# Altium PCB CD2840ADX-V22.PcbDoc
Units mil, origin at the board's own origin, x right, y up, seen from the top; angles counter-clockwise.
Board outline 1576.8 x 1102.34 mil, 2 copper layers (Top Layer, Bottom Layer), stack 39.414 mil thick; 60 components, 48 nets, 201 pads, 464 vias.
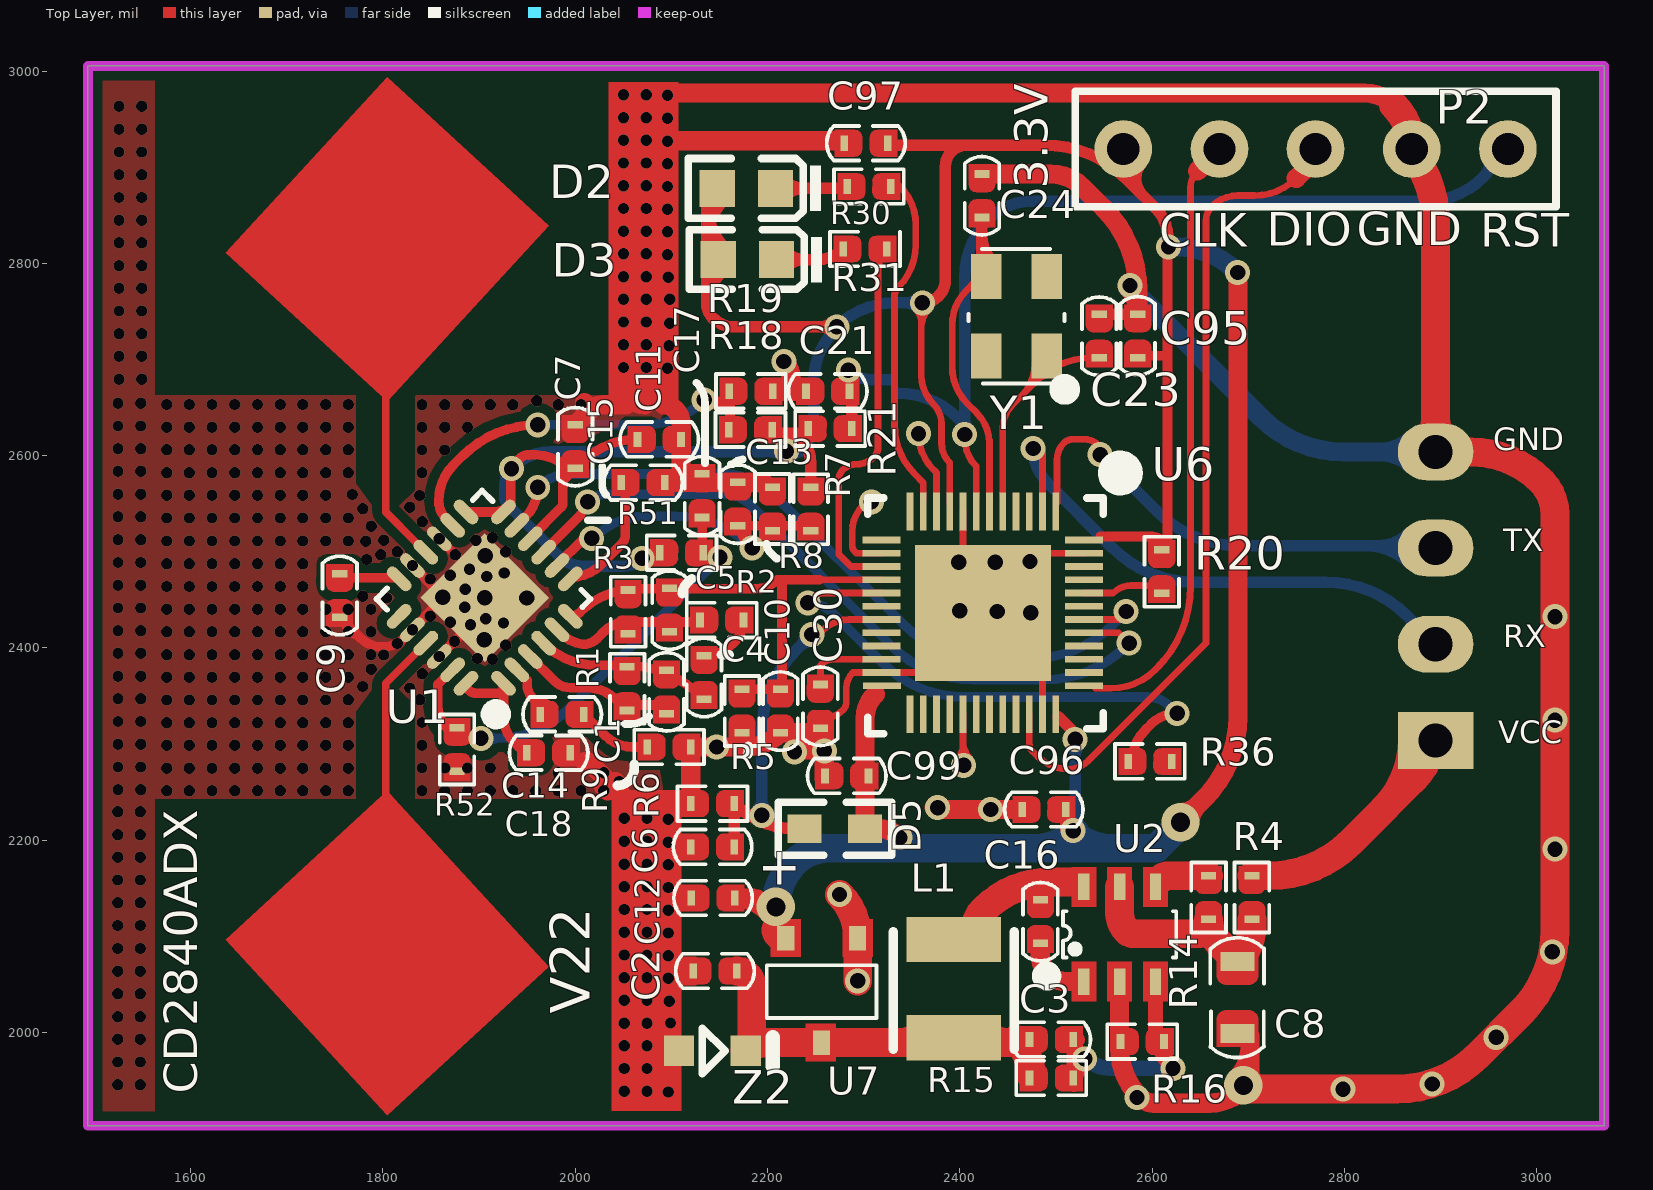
[diagram p0: Top Layer view]
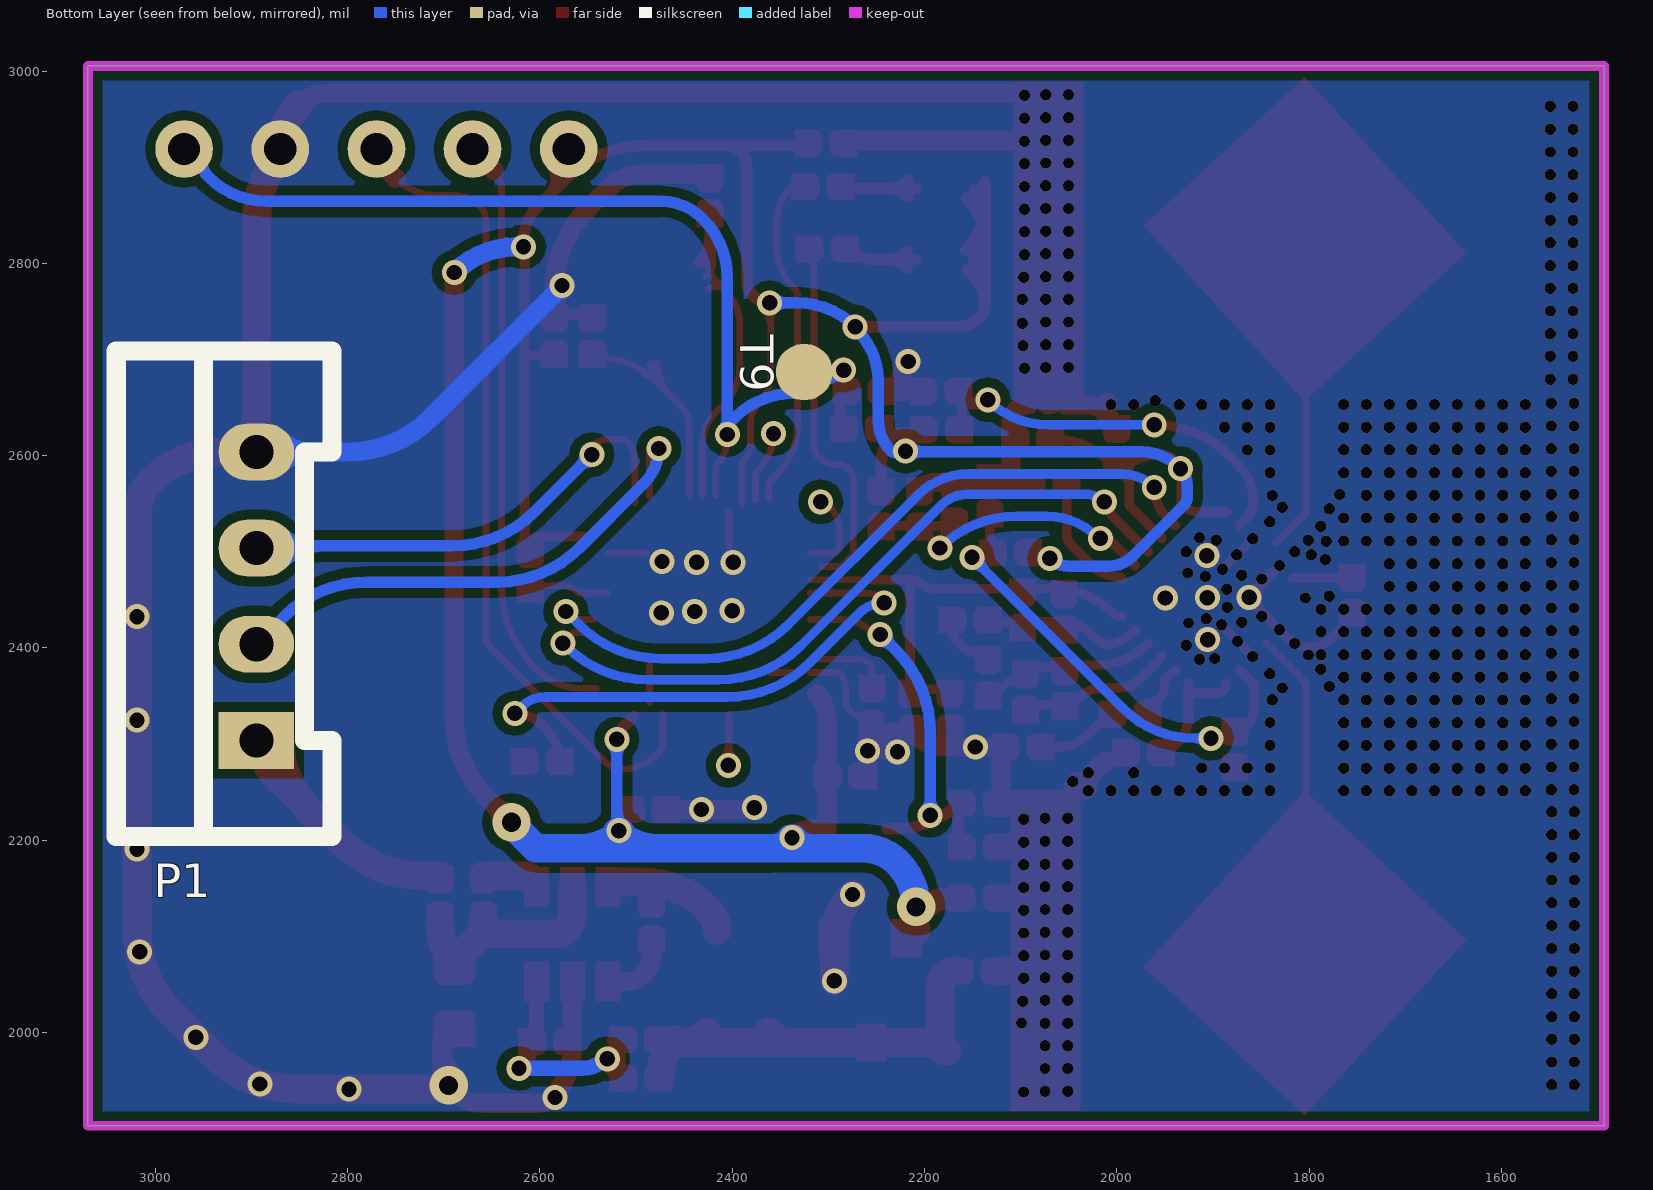
[diagram p1: Bottom Layer view, seen from below]

## Layer stack, top to bottom
Top Layer: signal copper 1.4
Dielectric: core 36.6142, FR-4, Dk 4.8
Bottom Layer: signal copper 1.4

## Board outline
1493.2,3005.34 3070,3005.34 3070,1903 1493.2,1903 1493.2,3005.34

## Design rules (kind name [scope] priority, off if disabled: settings)
Clearance [All] p1: gap=6
ComponentClearance [All] p1: gap=10 collisioncheckmode=3 verticalgap=10
PolygonConnect [All] p1: connectstyle=Direct reliefconductorwidth=10 reliefentries=4 polygonreliefangle="90 Angle"
RoutingVias [All] p1: holewidth=28 width=50 viastyle="Through Hole" minholewidth=15 minwidth=24 maxholewidth=28 maxwidth=50
SolderMaskExpansion [All] p1: expansion=4
TestPointUsage [All] p1: valid=0 allowmultiple=FALSE
Testpoint [All] p1: side=3 testpointundercomponent=TRUE minsize=40 maxsize=100 preferedsize=60 minholesize=0 maxholesize=40 preferedholesize=32 testpointgrid=1 style=297 order=0-112345678
Width [All] p1: maxlimit=30 minlimit=7 preferedwidth=10
18 further rules are at their usual default settings.

## Components (designator, comment, footprint, x,y, rotation, side; value= is the part's Value field where it differs from the comment)
C1 "5nF/NA-FSK" C0402#1 2095,2377 r270 top (schematic designator C16)
C2 "10uF" C0402#1 2168,2064 r180 top (schematic designator C16)
C3 "22pF" C0402#1 2517.75,1992.75 r180 top (schematic designator C16)
C4 "10uF" C0402#1 2134,2392 r270 top (schematic designator C16)
C5 "5nF/NA-FSK" C0402#1 2098,2462 r270 top (schematic designator C16)
C6 "0.1uF" C0402#1 2165.47,2193.1 r180 top (schematic designator C16)
C7 "100nF" C0402#1 2000,2632 r270 top (schematic designator C16)
C8 "10uF/16V" C0603 2688.75,2073.05 r270 top
C9 "100nF" C0402#1 1755,2432 r90 top (schematic designator C16)
C10 "0.1uF/NA-FSK" C0402#1 2213.39,2357 r270 top
C11 "10uF" C0402#1 2110,2617 r180 top (schematic designator C16)
C12 "10uF" C0402#1 2166,2140 r180 top (schematic designator C16)
C13 "10uF" C0402#1 2169,2527 r90 top (schematic designator C16)
C14 "10uF" C0402#1 2009,2331 r180 top (schematic designator C16)
C15 "10uF" C0402#1 2048,2572 r0 top (schematic designator C16)
C16 "0.1uF" C0402#1 2483.75,2138.05 r270 top
C17 "10uF" C0402#1 2132,2581 r270 top (schematic designator C16)
C18 "100pF/NA-FSK" C0402#1 1995,2291 r180 top (schematic designator C16)
C21 "100nF" C0402#2 2240,2667 r0 top
C23 "12pF" C0402#2 2545,2747 r270 top
C24 "12pF" C0402#2 2423,2893 r270 top
C30 "100nF" C0402#2 2255,2362 r270 top
C95 "10uF/6.3V" C0402#2 2585,2702 r90 top
C96 "0.1uF/50V" C0402#2 2510,2232 r180 top
C97 "0.1uF/50V" C0402#2 2325,2925 r180 top
C99 "0.1uF/50V" C0402#2 2305,2267 r180 top
D2 "红灯" LC-0603_LED_S1 2178,2878 r180 top
D3 "绿灯" LC-0603_LED_S1 2179,2804 r180 top
D5 "PT19-21C" LED-0603 2270,2212 r0 top
L1 "PRS3015-100MT" PRS3015 2393.75,2100.75 r270 top
P1 "SWD" XH2.54mm 2894.85,2301.42 r270 bottom locked
P2 "DIP1X5-2.54" DIP1X5-2.54 2570,2919 r0 top
R1 "750k" R0402#1 2054,2335 r90 top (schematic designator R14)
R2 "20k" R0402#1 2175,2429 r180 top (schematic designator R14)
R3 "100K-NA" R0402#1 2055,2415 r90 top (schematic designator R14)
R4 "5.6" R0402#1 2703.75,2163.05 r270 top (schematic designator R14)
R5 "47k/NA-FSK" R0402#1 2173.39,2357 r270 top (schematic designator R14)
R6 "47k" R0402#1 2165.47,2238.1 r180 top (schematic designator R14)
R7 "12K" R0402#1 2245,2567 r270 top (schematic designator R14)
R8 "10k" R0402#1 2205,2522 r90 top (schematic designator R14)
R9 "18K" R0402#1 2075,2297 r0 top (schematic designator R14)
R14 "47k" R0402#1 2658.75,2163.05 r270 top
R15 "25.5k" R0402#1 2517.75,1952.75 r180 top
R16 "5.1k" R0402#1 2567.09,1990.55 r0 top
R18 "10k/NA-FSK" R0402#1 2205,2627 r180 top (schematic designator R14)
R19 "10k/NA-FSK" R0402#1 2160,2667 r0 top (schematic designator R14)
R20 "4.7K" R0402#2 2610,2502 r270 top
R21 "4.7KΩ" R0402#2 2287.8,2628.14 r180 top
R30 "1KΩ" R0402#2 2328,2880 r180 top
R31 "1KΩ" R0402#2 2324,2815 r180 top
R36 "100R" R0402#2 2575,2282 r0 top
R51 "100K" R0402#2 2088,2499 r0 top
R52 "20K" R0402#2 1877,2317 r270 top
T9 "" TestPoints 2330,2692 r270 bottom
U1 "XBR8161" QFN24 1855.75,2513.6 r135 top (schematic designator QFN-1)
U2 "SY8120B1ABC" SOT-23-6 2528.75,2053.05 r90 top
U6 "HC32F460JEUA-QFN48TR" QFN48-5X5mm 2424,2541 r270 top
U7 "ME6216A33M3G" SOT-23-L 2293.75,2098.05 r270 top (schematic designator U6)
Y1 "8MHZ-1C208000CE0R" OSC-SMD_3225 2459,2745 r90 top
Z2 "ESD5Z5.0T1G" SOD323 2189,1981 r180 top

## Footprints (in the part's own frame and the unit in brackets; to place one, negate y for a bottom-side part, rotate by r counter-clockwise, add the part's x,y. Pads: shape width x height; smd on the part's side, far side on the other; paste and mask are expansions set on the pad)
C0402#1 [mm]
  rect 0.2x0.4 smd: 1(0,0) 2(1.15,0)
  Top Layer region: 0.873,0.352 0.873,-0.351 1.401,-0.351 1.401,0.352
  Top Layer region: -0.252,0.352 -0.252,-0.351 0.276,-0.351 0.353,-0.336 0.418,-0.292 0.461,-0.227 0.477,-0.151 0.477,-0.151 0.477,0.152 0.461,0.228 0.418,0.293 0.353,0.337 0.276,0.352 0.276,0.352
  Top Layer region: 1.402,-0.352 1.402,0.351 0.874,0.351 0.797,0.336 0.732,0.292 0.689,0.227 0.673,0.151 0.673,0.151 0.673,-0.152 0.689,-0.228 0.732,-0.293 0.797,-0.337 0.874,-0.352 0.874,-0.352
  silkscreen extent -0.46,-0.46 1.61,0.46, body extent 0.08,-0.3 1.08,0.3, height 0.2
C0402#2 [mm]
  rect 0.2x0.4 smd: 1(0,0) 2(1.15,0)
  Top Layer region: -0.252,0.352 -0.252,-0.351 0.276,-0.355 0.354,-0.34 0.421,-0.295 0.465,-0.229 0.481,-0.151 0.477,-0.151 0.481,0.152 0.465,0.23 0.421,0.296 0.354,0.34 0.276,0.356 0.276,0.352
  Top Layer region: 1.402,-0.352 1.402,0.351 0.874,0.355 0.796,0.34 0.729,0.295 0.685,0.229 0.669,0.151 0.673,0.151 0.669,-0.152 0.685,-0.23 0.729,-0.296 0.796,-0.34 0.874,-0.356 0.874,-0.352
  silkscreen extent -0.46,-0.46 1.61,0.46, body extent 0.08,-0.3 1.08,0.3, height 0.2
C0603 [mil]
  rect 19.8x35.55 smd mask+0: 1(-0.92,0) 2(74,0)
  Top Layer region: 13.34,-21.73 14.89,-21.61 16.39,-21.25 17.82,-20.66 19.14,-19.85 20.32,-18.84 21.33,-17.66 22.14,-16.34 22.73,-14.91 23.09,-13.4 23.21,-11.86 23.18,-11.86 23.21,11.88 23.09,13.43 22.73,14.93 22.14,16.36 21.33,17.68 20.32,18.86 19.14,19.87 17.82,20.68 16.39,21.27 14.89,21.63 13.34,21.75 13.34,21.72 -14.73,21.72 -14.73,-21.7
  Top Layer region: 59.72,-21.73 58.17,-21.61 56.67,-21.25 55.24,-20.66 53.92,-19.85 52.74,-18.84 51.73,-17.66 50.92,-16.34 50.33,-14.91 49.97,-13.4 49.85,-11.86 49.88,-11.86 49.85,11.88 49.97,13.43 50.33,14.93 50.92,16.36 51.73,17.68 52.74,18.86 53.92,19.87 55.24,20.68 56.67,21.27 58.17,21.63 59.72,21.75 59.72,21.72 87.79,21.72 87.79,-21.7
  silkscreen extent -25,-28 99,28, body extent 6,-15 68,16, height 12
DIP1X5-2.54 [mil]
  round 60 hole 33.46: 1(0,0) 2(100,0) 3(200,0) 4(300,0) 5(400,0)
  silkscreen extent -50,-60 450,60
LC-0603_LED_S1 [mm]
  rect 0.93x0.98 smd: A(0.77,0) K(-0.77,0)
  silkscreen extent -1.97,-0.79 1.54,0.79, body extent -0.8,-0.4 0.8,0.4, height 0.6
LED-0603 [mm]
  rect 0.9x0.762 smd: 1(-0.8,0) 2(0.8,0)
  silkscreen extent -1.5,-0.7 1.5,0.7
OSC-SMD_3225 [mm] "OSC-SMD-3225"
  rect 1.2x0.8 smd: 1(-1.05,-0.8) 2(1.05,-0.8) 3(1.05,0.8) 4(-1.05,0.8)
  silkscreen extent -1.98,-1.37 1.78,1.27
PRS3015 [mm]
  rect 1.2x2.5 smd: 1(0.1,0) 2(2.7,0)
  silkscreen extent -0.1,-1.6 3,1.6, body extent -0.1,-1.5 2.9,1.5, height 1.5
QFN24 [mm]
  oval 0.8x0.3 smd: 1(-3.95,1.45) 2(-3.95,0.95) 3(-3.95,0.45) 4(-3.95,-0.05) 5(-3.95,-0.55) 6(-3.95,-1.05) 13(-0.05,-1.05) 14(-0.05,-0.55) 15(-0.05,-0.05) 16(-0.05,0.45) 17(-0.05,0.95) 18(-0.05,1.45)
  oval 0.3x0.8 smd: 7(-3.25,-1.75) 8(-2.75,-1.75) 9(-2.25,-1.75) 10(-1.75,-1.75) 11(-1.25,-1.75) 12(-0.75,-1.75) 19(-0.75,2.15) 20(-1.25,2.15) 21(-1.75,2.15) 22(-2.25,2.15) 23(-2.75,2.15) 24(-3.25,2.15)
  rect 2.4x2.4 smd: 25(-2,0.2)
  silkscreen extent -4.59,-1.75 0.05,2.37
QFN48-5X5mm [mm] "QFN48-5X5mm"
  rect 1x0.18 smd: 1(-0.02,1.925) 2(-0.02,1.575) 3(-0.02,1.225) 4(-0.02,0.875) 5(-0.02,0.525) 6(-0.02,0.175) 7(-0.02,-0.175) 8(-0.02,-0.525) 9(-0.02,-0.875) 10(-0.02,-1.225) 11(-0.02,-1.575) 12(-0.02,-1.925) 25(5.33,-1.925) 26(5.33,-1.575) 27(5.33,-1.225) 28(5.33,-0.875) 29(5.33,-0.525) 30(5.33,-0.175) 31(5.33,0.175) 32(5.33,0.525) 33(5.33,0.875) 34(5.33,1.225) 35(5.33,1.575) 36(5.33,1.925)
  rect 0.18x1 smd: 13(0.73,-2.675) 14(1.08,-2.675) 15(1.43,-2.675) 16(1.78,-2.675) 17(2.13,-2.675) 18(2.48,-2.675) 19(2.83,-2.675) 20(3.18,-2.675) 21(3.53,-2.675) 22(3.88,-2.675) 23(4.23,-2.675) 24(4.58,-2.667) 37(4.58,2.675) 38(4.23,2.675) 39(3.88,2.675) 40(3.53,2.675) 41(3.18,2.675) 42(2.83,2.675) 43(2.48,2.675) 44(2.13,2.675) 45(1.78,2.675) 46(1.43,2.675) 47(1.08,2.675) 48(0.73,2.675)
  rect 3.6x3.6 smd: 49(2.655,0)
  silkscreen extent -1.07,-3.05 5.84,3.7
R0402#1 [mm]
  rect 0.2x0.4 smd: 1(0,0) 2(1.15,0)
  Top Layer region: 0.873,0.352 0.873,-0.351 1.401,-0.351 1.401,0.352
  Top Layer region: -0.252,0.352 -0.252,-0.351 0.276,-0.351 0.353,-0.336 0.418,-0.292 0.461,-0.227 0.477,-0.151 0.477,-0.151 0.477,0.152 0.461,0.228 0.418,0.293 0.353,0.337 0.276,0.352 0.276,0.352
  Top Layer region: 1.402,-0.352 1.402,0.351 0.874,0.351 0.797,0.336 0.732,0.292 0.689,0.227 0.673,0.151 0.673,0.151 0.673,-0.152 0.689,-0.228 0.732,-0.293 0.797,-0.337 0.874,-0.352 0.874,-0.352
  silkscreen extent -0.35,-0.46 1.5,0.46, body extent 0.12,-0.26 1.12,0.24, height 0.35
R0402#2 [mm]
  rect 0.2x0.4 smd: 1(0,0) 2(1.15,0)
  Top Layer region: 1.402,-0.352 1.402,0.351 0.874,0.355 0.796,0.34 0.729,0.295 0.685,0.229 0.669,0.151 0.673,0.151 0.669,-0.152 0.685,-0.23 0.729,-0.296 0.796,-0.34 0.874,-0.356 0.874,-0.352
  Top Layer region: -0.252,0.352 -0.252,-0.351 0.276,-0.355 0.354,-0.34 0.421,-0.295 0.465,-0.229 0.481,-0.151 0.477,-0.151 0.481,0.152 0.465,0.23 0.421,0.296 0.354,0.34 0.276,0.356 0.276,0.352
  silkscreen extent -0.35,-0.46 1.5,0.46, body extent 0.12,-0.26 1.12,0.24, height 0.35
SOD323 [mm]
  rect 0.8x0.8 smd: A(2.06,0) K(0.3,0)
  silkscreen extent 0.84,-0.6 1.44,0.6, body extent -0.17,-0.62 2.53,0.63, height 1.1
SOT-23-6 [mm]
  rect 0.7x0.3 smd: 1(0,0) 2(0,-0.95) 3(0,-1.9) 4(2.5,-1.9) 5(2.5,-0.95) 6(2.5,0)
  Top Layer region: 1.972,-2.226 3.025,-2.226 3.025,-1.573 1.972,-1.573
  Top Layer region: 1.972,-0.335 3.025,-0.335 3.025,0.318 1.972,0.318
  Top Layer region: -0.527,-2.226 0.526,-2.226 0.526,-1.573 -0.527,-1.573
  Top Layer region: -0.527,-1.276 0.526,-1.276 0.526,-0.623 -0.527,-0.623
  Top Layer region: -0.527,-0.335 0.526,-0.335 0.526,0.318 -0.527,0.318
  Top Layer region: 1.972,-1.276 3.025,-1.276 3.025,-0.623 1.972,-0.623
  silkscreen extent 0.63,-2.45 1.86,0.54, body extent -0.16,-2.39 2.64,0.51, height 1.45
SOT-23-L [mm]
  rect 0.65x0.45 smd: 1(0,0) 2(0,-1.9) 3(2.757,-0.95)
  Top Layer region: -0.507,-0.398 0.496,-0.398 0.496,0.405 -0.507,0.405
  Top Layer region: -0.507,-2.303 0.496,-2.303 0.496,-1.5 -0.507,-1.5
  Top Layer region: 2.254,-1.374 3.257,-1.374 3.257,-0.571 2.254,-0.571
  silkscreen extent 0.71,-2.4 2.11,0.5, body extent 0.17,-2.44 2.67,0.56, height 1.05
TestPoints [mil] "TestPoints"
  round 59.06 smd: 1(5,5)
XH2.54mm [mm]
  rect 1.5x2 hole 0.9: 1(-0.064,0)
  oval 1.5x2 hole 0.9: 2(-2.603,0) 3(-5.144,0) 4(-7.683,0)
  silkscreen extent -10.35,-3.7 2.48,2

## Part data
C1 C2 C3 C4 C5 C6 C7 C8 C9 C10 C11 C12 C13 C14 C15 C16 C17 C18 C30: library part Cap, "Capacitor"
C21: library part "0402 100nF (104) 10% 16V", "贴片电容"
C23 C24: library part "0402 22pF (220) 5% 50V", "贴片电容"
C95 C96 C97 C99: library part "0402 2.2nF (222) 10% 50V", "贴片电容"
D2 D3: library part "0603 红灯", "发光二极管"
D5: library part "Photo Sen", "Photosensitive Diode"
L1: library part Inductor, "Inductor"
P1: library part "Header 3", "Header, 3-Pin"
P2: library part DIP1X6-2.54mm
R1 R2 R3 R4 R5 R6 R7 R8 R9 R14 R15 R16 R18 R19 R20 R51 R52: library part Res2, "Resistor"
R21 R36: library part "0402 4.7KΩ (4701) 1%", "贴片电阻"
R30 R31: library part "0402 1KΩ (1001) 1%", "贴片电阻"
T9: library part TestPoints, "TestPoints"
U1: library part XBR1000
U2: library part H9108
U6: library part HC32F460JETA-LQFP48
U7: library part SSP6206
Y1: library part "SMD-3225_4P  25MHZ 12PF 10PPM", "贴片晶振"
Z2: library part "D Zener", "Zener Diode"

## Via types
v1: diameter 11.81, hole 11.81, Top Layer to Bottom Layer, tented both sides, 400 vias
v2: diameter 26, hole 16, Top Layer to Bottom Layer, tented both sides, 61 vias
v3: diameter 40, hole 20, Top Layer to Bottom Layer, tented both sides, 3 vias

## Nets (pads, with @x,y where several pads share a name; then routed paths per layer and width w, separated by ;. In a path a pad name is that pad's centre, name@x,y a point inside that pad or via, vN(x,y) a via of type N, cw(c..) or ccw(c..) an arc to the next point about the centre after c; other vN are vias at no path point)
3.3V: C7.2 C11.2 C12.1 C95.1 C96.1 C97.1 C99.1 D2.A D3.A D5.2 P2.1 R7.1 R18.1 R20.1 R21.2 R51.1 U1.10 U1.12 U1.13 U6.9 U6.24 U6.36 U6.48 U7.2 | length 5085.2
  Top Layer w7: v2@2354.28,2752.28 cw(c2340.48,2738.48) 2360,2738.48 ; 2360,2733.65 cw(c2386.35,2733.65) v2@2367.72,2752.28 ; v2@2360,2759 2360,2683.97 ccw(c2403.38,2683.97) 2372.71,2653.29 cw(c2352.69,2633.27) 2381,2633.27 2381,2613.09 ccw(c2410.19,2613.09) 2389.55,2592.45 U6.9@2389.55,2550
  Top Layer w10: U1.13 1913.75,2541.44 ccw(c1913.75,2567.25) 1932,2549 ccw(c1929.59,2551.41) 1933,2551.41 1933,2575.27 cw(c1963.73,2575.27) 1942,2597 cw(c1951.66,2587.34) 1951.66,2601 ; 1951.68,2600.78 cw(c1956.59,2546.89) C7.2@1994.85,2585.15 ; U1.10 cw(c1954.61,2513.6) 1953.61,2514.61 1985.38,2546.38 ; 1985.37,2546.37 ccw(c1981.45,2550.3) 1987,2550.3 1987,2590 ; 1987,2574 ccw(c1987,2574.67) 1987.47,2574.19 2005.92,2592.64 cw(c2064.72,2533.83) C11.2 ; 1995.09,2581.82 ccw(c1990.19,2586.72) C7.2@1997.13,2586.72 ; C7.2@2002.87,2586.72 cw(c2009.81,2586.72) 2004.91,2591.63 ; 2546,2516 2600.18,2516 cw(c2600.18,2502.08) 2610,2511.94 ; R20.1@2616,2502 v2@2616,2828 ; 2616,2704 C95.1@2589.83,2704 ; C95.1@2589.83,2704 ccw(c2589.83,2697.17) C95.1 cw(c2589.83,2697.17) C95.1@2589.83,2704
  Top Layer w12: v2@2071,2492.75 cw(c2081.86,2481.89) 2081.86,2497.25 2087.75,2497.25 ccw(c2087.75,2483.61) v2@2075.69,2489.98 ; 2136.75,2756.93 cw(c2180.37,2756.93) D3.A@2155.66,2792.87 ; 2136.75,2779.74 cw(c2164.68,2779.74) D3.A@2148.86,2802.76 ; D3.A@2136.75,2820.9 cw(c2203.8,2820.9) D2.A@2156.39,2868.31 ; 2136.75,2834.54 ccw(c2178.24,2834.54) D3.A@2148.9,2805.2 ; 2136.75,2849.88 cw(c2174.83,2849.88) D2.A@2147.9,2876.8 ; D2.A@2136.75,2863.51 ccw(c2207.21,2863.51) D3.A@2157.39,2813.69 ; D2.A@2136.75,2878 2136.75,2758.5 ccw(c2159.09,2758.5) 2143.29,2742.71 ccw(c2145,2744.41) 2145,2742 ccw(c2164.31,2761.31) 2164.31,2734 v2(2272,2734) ; D2.A@2136.75,2881.73 cw(c2141.02,2881.73) D2.A@2138,2884.75 ; R18.1@2205,2623.14 2234.72,2623.14 ; v2@2215.21,2610.08 ccw(c2204.11,2623.14) 2221.25,2623.14 2221.25,2608.37 cw(c2216.13,2608.37) v2@2219.75,2604.75 ; 2221.25,2618.03 ccw(c2233.03,2618.03) v2@2224.7,2609.7 ; 2232.79,2621.21 cw(c2203.32,2591.73) 2245,2591.73 R7.1 ; v2@2267.05,2729.05 ccw(c2255.1,2717.1) 2255.1,2734 ccw(c2255.1,2750.9) v2@2267.05,2738.95 ; 2329.83,2923 2488,2923 cw(c2488,2802.29) 2573.36,2887.64 2603.98,2857.02 cw(c2574.96,2828) v2@2616,2828 ; v2(2361,2759) ccw(c2361,2783) 2385,2783 2385,2901 cw(c2407,2901) 2407,2923 ; U6.36@2502.55,2328.39 2515.8,2315.15 cw(c2505.65,2305) v2(2520,2305) ; v2@2510,2212.24 C96.1 ccw(c2526.74,2232) v2@2520.54,2216.45 ; P2.1@2579.23,2911.34 ccw(c2596.96,2896.62) 2580.67,2880.33 ; P2.1@2588.47,2903.67 ccw(c2607.13,2888.18) 2589.98,2871.02
  Top Layer w20: v3@2199.44,2127.1 ccw(c2180.53,2119.69) 2180.53,2140 ; v3@2201.26,2124.12 ccw(c2166,2092.91) C12.1 2180.53,2140 ; v3@2202.39,2123.03 cw(c2181.03,2097.13) U7.2@2214.6,2097.13 ; v3@2204.32,2121.78 cw(c2196.16,2105.24) U7.2@2214.6,2105.24 ; U7.2@2214.6,2097.64 2214.6,2105.92 ccw(c2208.75,2105.92) 2208.75,2111.78 ccw(c2180.53,2111.78) 2180.53,2140 ; 2312,2352 ccw(c2337.36,2326.64) 2301.5,2326.64 D5.2 2315.42,2212 cw(c2315.42,2180.42) v2@2337.75,2202.75 ; v3(2629.5,2218.75) 2653.89,2243.14 ccw(c2568.54,2328.5) 2689.25,2328.5 v2@2689.25,2790.5 ; v3@2629.5,2228.75 ccw(c2629.5,2252.89) 2646.57,2235.82 ccw(c2663.64,2218.75) v3@2639.5,2218.75
  Top Layer w30: 2208.75,2107.32 ccw(c2217.36,2107.32) 2211.27,2101.23 ccw(c2218.95,2108.9) 2214.6,2098.96 ccw(c2218.95,2108.9) U7.2
  Bottom Layer w12: v2(1933.75,2586.5) ccw(c1950.65,2569.6) 1926.75,2569.6 1926.75,2557.5 ccw(c1940.03,2557.5) 1930.63,2548.12 1983,2495.75 ccw(c2008.95,2521.7) 2008.95,2485 2049.58,2485 ccw(c2049.58,2513.17) v2@2069.5,2493.25 ; v2@1934,2587.25 cw(c1974.44,2546.81) 1974.44,2604 2234.04,2604 ; 2201.04,2604 ccw(c2201.04,2623.46) v2@2214.8,2609.7 ; 2204.66,2604 cw(c2204.66,2589.66) v2@2214.8,2599.8 ; v2@2224.89,2600 cw(c2234.03,2591.55) 2234.03,2604 ; v2@2225.62,2608.57 ccw(c2234.03,2614.04) 2234.03,2604 ; v2@2356.05,2754.05 ccw(c2344.1,2742.1) 2344.1,2759 ccw(c2344.1,2775.9) v2@2356.05,2763.95 ; v2(2361,2759) 2332.36,2759 ccw(c2332.36,2673.64) v2(2272,2734) cw(c2267.78,2734) 2270.76,2731.01 2269.64,2729.89 ccw(c2321.28,2678.25) 2248.25,2678.25 2248.25,2638.32 cw(c2199.72,2638.32) 2234.04,2604 ; v2@2513,2214.9 ccw(c2496.1,2231.8) 2520,2231.8 ; v2@2513.88,2204.25 cw(c2505.39,2192.37) 2520,2192.37 ; v2@2515.05,2300.05 cw(c2503.1,2288.1) 2520,2288.1 cw(c2536.9,2288.1) v2@2524.95,2300.05 ; 2520,2192.49 v2(2520,2305)
  Bottom Layer w20: v2(2617,2817.25) 2624.42,2817.25 cw(c2624.42,2725.92) v2(2689,2790.5)
  Bottom Layer w30: v3(2208.75,2130.75) cw(c2273.93,2130.75) 2227.84,2176.84 cw(c2263.83,2140.85) 2263.83,2191.75 2604.5,2191.75 v3@2628.75,2216 ; 2316.02,2191.75 ccw(c2316.02,2224.48) v2@2339.16,2201.34 ; v2@2336.34,2201.34 ccw(c2359.48,2224.48) 2359.48,2191.75 ; 2478.84,2191.75 ccw(c2478.84,2249.06) v2@2519.36,2208.54 ; v2@2516.54,2208.54 ccw(c2557.06,2249.06) 2557.06,2191.75
  other v2: 2337.75,2202.75 2517.95,2209.95 2069.5,2493.25 2219.75,2604.75
3.6V: C2.1 C3.2 L1.2 R15.2 U7.3 Z2.K | length 503.9
  Top Layer w30: C2.1 cw(c2168,2048.5) 2183.5,2048.5 2183.5,1988.5 cw(c2184.51,1988.5) 2184.51,1989.51 2450.92,1989.51 ; Z2.K@2176.66,1981.53 ccw(c2160.15,1998.04) 2183.5,1998.04 ; Z2.K@2177.72,1980.47 cw(c2199.53,1958.66) 2199.53,1989.51 ; 2335.41,1989.51 ccw(c2335.41,2027.2) L1.2@2362.06,2000.55 ; L1.2@2425.6,2000.39 ccw(c2450.92,2024.41) 2450.92,1989.51 ; R15.2@2474.56,1954.58 ccw(c2420.58,1954.58) 2458.75,1992.75 cw(c2450.92,2000.58) 2450.92,1989.51
5-15V: P1.1 R4.1 | length 337.4
  Top Layer w30: R4.1 2721.55,2163.05 ccw(c2721.55,2283.76) 2806.9,2198.4 2871.77,2263.27 ccw(c2823.55,2311.5) P1.1@2891.75,2311.5 ; 2840.83,2232.33 ccw(c2769.24,2303.92) P1.1@2870.48,2303.92
ADC1: U6.10 | length 83.5
  Top Layer w7: v2@2360.48,2614.6 cw(c2368.88,2623) v2(2357,2623) ccw(c2410.11,2623) 2372.56,2585.44 2375.55,2582.45 ; U6.10@2375.77,2554 2375.77,2582.23
ADC2: U6.14 | length 90.1
  Top Layer w7: v2(2308,2552) ccw(c2308,2539.93) 2299.46,2548.46 2299.19,2548.19 ccw(c2326.21,2521.17) 2288,2521.17 2288,2507.24 ccw(c2298.24,2507.24) 2291,2500 2291.92,2499.08 ccw(c2292.73,2499.89) 2292.73,2498.74 2292.77,2498.7 ccw(c2293.31,2499.23) 2293.31,2498.48 U6.14
ADC3: U6.18
FSK_PWM: U1.9 U6.41 | length 739.3
  Top Layer w7: U6.41@2546,2415.8 2565.2,2415.8 v2@2577,2404
  Top Layer w10: U1.9 cw(c1968.14,2499.68) 1967.41,2500.41 2005.46,2538.46
  Bottom Layer w10: v2(2013,2552) ccw(c2013,2556.83) 2016.41,2553.41 cw(c2032.31,2537.51) 2032.31,2560 2155,2560 cw(c2155,2521.37) 2182.31,2548.69 2328.64,2402.36 ccw(c2414,2487.71) 2414,2367 2488,2367 ccw(c2488,2487.71) 2573.36,2402.36 v2(2576,2405)
GND: C2.2 C6.2 C7.1 C8.2 C9.1 C10.2 C11.1 C12.2 C13.2 C15.2 C17.1 C18.1 C21.1 C23.1 C24.1 C30.2 C95.2 C96.2 C97.2 C99.2 P1.4 P2.4 R5.2 R6.2 R8.2 R9.2 R16.1 R19.2 R52.2 U1.15 U1.17 U1.20 U1.22 U1.25 U2.2 U6.8 U6.23 U6.35 U6.47 U6.49 U7.1 Z2.A | length 5343
  Top Layer w7: 2258,2327 ccw(c2258,2355.97) 2278.49,2335.49 ccw(c2270,2343.97) 2282,2343.97 2282,2358.32 cw(c2304.52,2358.32) 2288.6,2374.24 ; 2288.81,2374.46 U6.23 ; U6.23@2335,2374.47 U6.49@2361,2374.47 ; U6.49@2401,2494 ccw(c2395.37,2499.63) 2403.33,2499.63 U6.8 ; U6.35@2486,2343 U6.49@2486,2381 ; U6.49@2489,2498 cw(c2490.16,2496.84) 2490.16,2498.48 U6.47
  Top Layer w10: C9.1 1776.57,2410.43 ccw(c1799.34,2433.21) 1799.34,2401 ccw(c1799.34,2433.37) 1822.23,2410.48 v1(1830.7,2418.95) 1863,2453 1854,2462 v1(1830.7,2485.76) ; C9.1@1757.87,2432 ccw(c1764.81,2432) 1759.91,2427.09 ; C9.1@1758.05,2428.95 cw(c1745.87,2416.77) v1@1763.09,2416.77 ; v1@1764,2415.86 cw(c1764,2398.64) 1776.18,2410.82 ; v1@1848.1,2468.01 cw(c1832.78,2452.98) U1.25@1854.24,2452.77 ; v1@1848.63,2437.85 ccw(c1833.78,2451.94) U1.25@1854.25,2452.48 ; 1849.76,2439.04 cw(c1862.93,2426.55) U1.25@1862.45,2444.7 ; v1@1850.04,2433.02 cw(c1864.88,2433.42) U1.25@1854.11,2443.63 ; v1@1850.04,2471.71 ccw(c1863.93,2471.71) U1.25@1854.11,2461.89 ; 1850.23,2465.84 ccw(c1862.49,2477.86) U1.25@1862.32,2460.69 ; v1(1858.54,2391.11) v1(1891,2424) ; v1(1858.54,2513.6) v1(1890,2482) ; v1@1850,2471.42 ccw(c1856.55,2469.26) 1851.62,2464.42 cw(c1856.32,2469.17) v1@1849.99,2471.41
  Top Layer w12: C23.1 cw(c2545.67,2746.33) 2545.67,2747.28 C95.2
  Top Layer w20: C7.1 2015.34,2647.34 cw(c2029,2633.69) 2029,2653 ; 2007.56,2639.56 ccw(c1998.44,2648.68) v1@2009.55,2655.22 ; 2010,2282 cw(c2010,2273.17) 2016.24,2279.42 2052.95,2242.71 ; v1@2026.42,2269.24 cw(c2008.75,2251.57) v1@2033.74,2251.57 ; v1@2029.65,2255.66 cw(c2029.65,2230.67) 2047.32,2248.34 ; 2029.65,2653 2053,2653 ; 2033.78,2261.88 ccw(c2045.62,2273.72) v1@2045.62,2256.97 ; v1@2041.53,2261.07 ccw(c2058.27,2261.07) 2046.43,2249.23 ; v1@2053.81,2977.25 2820.7,2977.25 cw(c2820.7,2934.28) 2851.08,2964.67 ; 2089.25,2195.75 2117.55,2195.75 cw(c2117.55,2193.1) C6.2 ; 2091.93,2653 cw(c2091.93,2635.93) 2104,2648 cw(c2089.51,2633.51) 2110,2633.51 2110,2572 ; v1@2093.98,2130.12 cw(c2115.41,2108.69) 2115.41,2139 ; v1@2093.98,2147.95 ccw(c2115.59,2169.57) 2115.59,2139 ; C15.2@2095.28,2572 2188.47,2572 cw(c2188.47,2550.75) R8.2@2203.5,2565.78 ; v1@2096.18,2927.5 C97.2@2279.72,2927.5 ; 2099.5,2139 2119.72,2139 ccw(c2119.72,2140) C12.2 ; R6.2@2120.2,2243 2120.2,2296.81 cw(c2120.46,2296.81) R9.2 2177.84,2297 ccw(c2177.84,2347.27) C10.2 2243.1,2311.72 cw(c2243.1,2294.91) 2254.98,2306.8 ; R19.2@2203,2667 C21.1 ; v2(2217,2698) cw(c2198.46,2679.46) 2224.68,2679.46 ; v2(2228,2292) cw(c2232.83,2287.17) 2232.83,2294 v2@2259,2294 ; C99.2@2259,2264 2259,2307.07 ; v2@2373,2234 ccw(c2377.83,2238.83) 2377.83,2232 C96.2 ; C24.1@2422.11,2893 2494.29,2893 cw(c2494.29,2845.41) 2527.94,2879.06 2549.66,2857.34 cw(c2464.31,2771.98) 2585.02,2771.98 C95.2 ; U2.2 2566.15,1984.04 ccw(c2639.04,1984.04) 2587.5,1932.5 ccw(c2601.99,1946.99) 2601.99,1926.5 2659.64,1926.5 ccw(c2659.64,1976.86) 2695.25,1941.25 ccw(c2679.56,1956.94) 2701.75,1956.94 C8.2@2701.75,1997 ; v2@2574.88,2774.88 cw(c2550.4,2750.4) C95.2@2585.02,2750.4 ; v3@2687.93,1952.07 ccw(c2654.56,1985.44) 2701.75,1985.44 ; C8.2@2696.69,1999.12 cw(c2684.49,1986.91) 2701.75,1986.91 ; 2033.69,2653 ccw(c2033.69,2678.31) 2051.59,2660.41 cw(c2033.69,2678.31) 2033.69,2653 ; 2054.41,2660.41 ccw(c2072.31,2678.31) 2072.31,2653 cw(c2072.31,2678.31) 2054.41,2660.41
  Top Layer w30: 2112.84,2064 C2.2 ; v2(2274.87,2143.63) cw(c2229.29,2098.05) U7.1 v2(2293.75,2053.75) ; v3@2695.25,1941.25 2854,1941.25 ccw(c2854,2061.96) 2939.36,1976.61 2983.64,2020.89 ccw(c2898.29,2106.25) 3019,2106.25 3019,2539.1 ccw(c2970.35,2539.1) 3004.75,2573.5 ccw(c2931.31,2500.06) 2931.31,2603.92 P1.4 2894.85,2842.15 ccw(c2774.14,2842.15) P2.4@2859.5,2927.5 ; v3@2698.54,1948.54 ccw(c2716.12,1966.12) 2716.12,1941.25 ; 2851.08,2964.67 cw(c2805.42,2919) P2.4 ; P1.4@2884.58,2614.19 ccw(c2859.78,2638.99) 2894.85,2638.99 ccw(c2929.92,2638.99) P1.4@2905.12,2614.19
  Bottom Layer w20: v2@1905.52,2494.33 cw(c1907.85,2494.33) v2(1906.2,2495.97) ; v2@1947.04,2451 ccw(c1947.04,2454.46) v2(1949.48,2452.01) ; v2(2577,2777) ccw(c2579.41,2777) 2577.71,2775.29 2713.73,2639.27 ccw(c2799.08,2724.63) 2799.08,2603.92 P1.4 ; P1.4@2871.2,2590.11 ccw(c2837.86,2556.77) 2837.86,2603.92 ccw(c2837.86,2651.06) P1.4@2871.2,2617.73
  other v1: 2096.87,1938.25 2051,1939 2074.62,1939 1524,1945.73 1547.62,1945.73 2051,1962.62 2074.62,1962.62 1524,1969.35 1547.62,1969.35 2051,1986.24 2074.62,1986.24 1524,1992.98 1547.62,1992.98 2051,2009.87 2074.62,2009.87 2099,2010 1524,2016.6 1547.62,2016.6 2051,2033.49 2074.62,2033.49 2097.75,2032.75 1524,2040.22 1547.62,2040.22 2096.87,2056.36 2051,2057.11 2074.62,2057.11 1524,2063.84 1547.62,2063.84 2096.87,2079.98 2051,2080.73 2074.62,2080.73 1524,2087.46 1547.62,2087.46 2051,2104.35 2074.62,2104.35 2096.87,2103.6 1524,2111.39 1547.62,2111.39 2096.87,2127.23 2051,2127.98 2074.62,2127.98 1524,2135.01 1547.62,2135.01 2096.87,2150.85 2051,2151.6 2074.62,2151.6 1524,2158.63 1547.62,2158.63 2096.87,2174.47 2051,2175.22 2074.62,2175.22 1524,2182.26 1547.62,2182.26 2096.87,2198.09 2051,2198.84 2074.62,2198.84 1524,2205.88 1547.62,2205.88 2096.87,2222.02 2051,2222.77 2074.62,2222.77 1524,2229.5 1547.62,2229.5 1575.02,2251.42 1598.65,2251.42 1622.27,2251.42 1645.89,2251.42 1669.51,2251.42 1693.13,2251.42 1716.76,2251.42 1740.38,2251.42 1764,2251.42 1840.67,2251.57 1864.29,2251.57 1887.91,2251.57 1911.54,2251.57 1935.16,2251.57 1958.78,2251.57 1982.4,2251.57 2006.02,2251.57 2029.65,2251.57 1524.5,2252.62 1548.12,2252.62 2045.62,2261.07 1982.4,2270.38 2029.65,2270.38 1575.02,2275.04 1598.65,2275.04 1622.27,2275.04 1645.89,2275.04 1669.51,2275.04 1693.13,2275.04 1716.76,2275.04 1740.38,2275.04 1764,2275.04 1840.67,2275.19 1864.29,2275.19 1887.91,2275.19 1911.54,2275.19 1524.5,2276.24 1548.12,2276.24 1575.02,2298.66 1598.65,2298.66 1622.27,2298.66 1645.89,2298.66 1669.51,2298.66 1693.13,2298.66 1716.76,2298.66 1740.38,2298.66 1764,2298.66 1840.67,2298.81 1524.5,2299.87 1548.12,2299.87 1575.02,2322.28 1598.65,2322.28 1622.27,2322.28 1645.89,2322.28 1669.51,2322.28 1693.13,2322.28 1716.76,2322.28 1740.38,2322.28 1764,2322.28 1840.67,2322.43 1524.5,2323.49 1548.12,2323.49 1575.02,2345.9 1598.65,2345.9 1622.27,2345.9 1645.89,2345.9 1669.51,2345.9 1693.13,2345.9 1716.76,2345.9 1740.38,2345.9 1764,2346.13 1838.35,2346.13 1524.5,2347.11 1548.12,2347.11 1828.04,2358.32 1779,2360 1575.02,2369.53 1598.65,2369.53 1622.27,2369.53 1645.89,2369.53 1669.51,2369.53 1693.13,2369.53 1716.76,2369.53 1740.38,2369.53 1764,2369.53 1524.5,2370.73 1548.12,2370.73 1841,2373.23 1788,2378 1914,2388.24 1898,2389 1575.02,2393.15 1598.65,2393.15 1622.27,2393.15 1645.89,2393.15 1669.51,2393.15 1693.13,2393.15 1716.76,2393.15 1740.38,2393.15 1764,2393.15 1787.62,2393.15 1800.78,2392.73 1524.5,2394.35 1548.12,2394.35 1927.66,2403 1815,2404.63 1874.36,2407.14 1575.02,2416.77 1598.65,2416.77 1622.27,2416.77 1645.89,2416.77 1669.51,2416.77 1693.13,2416.77 1716.76,2416.77 1740.38,2416.77 1764,2416.77 1787.62,2416.77 1524.5,2417.98 1548.12,2417.98 1925.35,2426 1870,2426.72 1907,2430.55 1849.14,2433 1575.02,2440.39 1598.65,2440.39 1622.27,2440.39 1645.89,2440.39 1669.51,2440.39 1693.13,2440.39 1716.76,2440.39 1740.38,2440.39 1764,2440.39 1787.62,2440.39 1524.5,2441.6 1548.12,2441.6 1885,2442.22 1803.92,2452 1779,2453.84 1885.43,2461.15 1575.02,2464.01 1598.65,2464.01 1622.27,2464.01 1645.89,2464.01 1669.51,2464.01 1693.13,2464.01 1716.76,2464.01 1524.5,2465.22 1548.12,2465.22 1849.14,2471.71 1908,2474.41 1870,2475.57 1926,2478 1575.02,2487.64 1598.65,2487.64 1622.27,2487.64 1645.89,2487.64 1669.51,2487.64 1693.13,2487.64 1716.76,2487.64 1524.5,2488.84 1548.12,2488.84 1783,2492 1797.68,2497 1875.2,2496.87 1815,2500.08 1927.66,2500 1575.02,2511.26 1598.65,2511.26 1622.27,2511.26 1645.89,2511.26 1669.51,2511.26 1693.13,2511.26 1716.76,2511.26 1740.38,2511.26 1764,2511.26 1782,2511 1524.5,2512.46 1548.12,2512.46 1800.78,2511.98 1896.65,2512 1914,2514.61 1788,2526.71 1841,2531.47 1575.02,2535.18 1598.65,2535.18 1622.27,2535.18 1645.89,2535.18 1669.51,2535.18 1693.13,2535.18 1716.76,2535.18 1740.38,2535.18 1764,2535.18 1524.5,2536.39 1548.12,2536.39 1779,2544.71 1828.04,2546.39 1575.02,2558.81 1598.65,2558.81 1622.27,2558.81 1645.89,2558.81 1669.51,2558.81 1693.13,2558.81 1716.76,2558.81 1740.38,2558.81 1838.35,2558.58 1524.5,2560.01 1548.12,2560.01 1768,2559.71 1575.02,2582.43 1598.65,2582.43 1622.27,2582.43 1645.89,2582.43 1669.51,2582.43 1693.13,2582.43 1716.76,2582.43 1740.38,2582.43 1764,2582.43 1840.67,2582.28 1524.5,2583.63 1548.12,2583.63 1575.02,2606.05 1598.65,2606.05 1622.27,2606.05 1645.89,2606.05 1669.51,2606.05 1693.13,2606.05 1716.76,2606.05 1740.38,2606.05 1764,2606.05 1840.67,2605.9 1864.29,2605.9 1524.5,2607.26 1548.12,2607.26 1575.02,2629.67 1598.65,2629.67 1622.27,2629.67 1645.89,2629.67 1669.51,2629.67 1693.13,2629.67 1716.76,2629.67 1740.38,2629.67 1764,2629.67 1840.67,2629.52 1864.29,2629.52 1887.91,2629.52 1524.5,2630.88 1548.12,2630.88 1575.02,2653.29 1598.65,2653.29 1622.27,2653.29 1645.89,2653.29 1669.51,2653.29 1693.13,2653.29 1716.76,2653.29 1740.38,2653.29 1764,2653.29 1840.67,2653.14 1864.29,2653.14 1887.91,2653.14 1911.54,2653.14 1935.16,2653.14 1982.4,2653.14 2006.02,2653.14 1524.5,2654.5 1548.12,2654.5 1960,2657 1525.5,2679.62 1549.12,2679.62 2096,2691 2050.13,2691.75 2073.75,2691.75 1525.5,2703.24 1549.12,2703.24 2097.5,2714.5 2050.13,2715.37 2073.75,2715.37 1525.5,2726.87 1549.12,2726.87 2098.25,2737.75 2050.13,2738.99 2073.75,2738.99 1525.5,2750.49 1549.12,2750.49 2050.13,2762.62 2073.75,2762.62 2098.13,2762.75 1525.5,2774.11 1549.12,2774.11 2050.13,2786.24 2073.75,2786.24 2096.88,2785.5 1525.5,2797.73 1549.12,2797.73 2096,2809.11 2050.13,2809.86 2073.75,2809.86 1525.5,2821.35 1549.12,2821.35 2050.13,2833.48 2073.75,2833.48 2096,2832.73 1525.5,2844.98 1549.12,2844.98 2096,2856.35 2050.13,2857.1 2073.75,2857.1 1525.5,2868.6 1549.12,2868.6 2096,2879.98 2050.13,2880.73 2073.75,2880.73 1525.5,2892.22 1549.12,2892.22 2050.13,2904.35 2073.75,2904.35 2096,2903.6 1525.5,2915.84 1549.12,2915.84 2096,2927.22 2050.13,2927.97 2073.75,2927.97 1525.5,2939.46 1549.12,2939.46 2096,2950.84 2050.13,2951.59 2073.75,2951.59 1525.5,2963.39 1549.12,2963.39 2096,2974.77 2050.13,2975.52 2073.75,2975.52
  other v2: 2584.25,1932.5 2798.5,1941.25 2891.25,1946.5 2957.78,1995.03 3016.25,2084 3019,2190.75 2432,2232 2377,2234 2259,2293 2147,2297 3019,2325 1905.52,2408.73 3019,2432.5 2473.75,2436.5 2439,2438 2400,2438.75 1905.86,2452.35 1862.24,2452.7 2399,2489 2437,2489 2473,2490
  other v3: 2695,1945
GREEN_LED: R31.1 U6.15 | length 383
  Top Layer w7: U6.15@2307,2484.7 2287,2484.7 2274,2497.7 2274,2575 cw(c2288.49,2575) 2278.24,2585.24 cw(c2292.14,2571.34) 2292.14,2591 ccw(c2292.14,2617.21) 2310.68,2598.68 ccw(c2300.24,2609.11) 2315,2609.11 2315,2793.27 cw(c2345.73,2793.27) R31.1
IFCAP: C17.2 R51.2 R52.1 U1.23 | length 553.5
  Top Layer w10: U1.23 1857,2362 1857,2340 ccw(c1891,2340) 1891,2306 v2(1902,2306) ; C17.2 2132,2502.08 ccw(c2136.36,2502.08) R51.2 ; v2@2142.85,2491.91 ccw(c2133.28,2488.99) R51.2 ; v2@2150.5,2494.25 ccw(c2139.03,2482.78) 2139.03,2499 R51.2
  Bottom Layer w10: v2(1902,2306) 1919,2306 ; v2@1908.16,2300.9 cw(c1919,2291.94) 1919,2306 ; v2@1908.16,2311.1 ccw(c1919,2320.06) 1919,2306 ; v2@2142.5,2494.25 cw(c2123.19,2494.25) 2136.84,2480.59 cw(c2150.5,2466.94) v2@2150.5,2486.25 ; v2(2150.5,2494.25) 1992.83,2336.58 cw(c1919,2410.41) 1919,2306
IFON: C18.2 U1.1 U1.24 | length 136.6
  Top Layer w10: U1.24 ccw(c1896.65,2363.27) 1896.65,2353 1925.35,2353 ; U1.1 1925.35,2328.62 ccw(c1962.99,2328.62) 1936.38,2302 1945.71,2292.66 ccw(c1949.72,2296.67) C18.2 ; 1940.81,2297.57 ccw(c1949.72,2306.48) C18.2@1949.72,2293.87
LIGHT: C6.1 D5.1 R6.1 U6.19 | length 464.6
  Top Layer w7: v2@2244.71,2405.71 2257,2418 cw(c2284.96,2390.04) 2284.96,2429.58 U6.19
  Top Layer w12: C6.1 R6.1 ccw(c2228.48,2301.1) 2228.48,2212 D5.1
  Bottom Layer w12: v2@2189.05,2230.95 ccw(c2177.1,2242.9) 2194,2242.9 ccw(c2210.9,2242.9) v2@2198.95,2230.95 ; v2(2194,2226) 2194,2312 cw(c2314.71,2312) 2229.36,2397.36 v2(2246,2414) ; v2@2239,2414 cw(c2222.1,2414) 2234.05,2402.05 cw(c2246,2390.1) v2@2246,2407
NetC3_1: C3.1 R15.1 R16.2 U2.3 | length 259.3
  Top Layer w16: R15.1@2518.75,1946.35 cw(c2543.53,1946.35) v2@2532.06,1968.32 ; R15.1@2518.75,1948.75 2518.75,1984.49 cw(c2530.15,1984.49) 2522.09,1992.55 ; U2.3 2603.54,2006.72 ccw(c2665.72,2006.72) v2(2621.75,1962.75)
  Bottom Layer w16: v2@2532.01,1972.75 ccw(c2556.15,1996.89) 2556.15,1962.75 v2(2621.75,1962.75)
  other v2: 2529.75,1972.75
NetC4_1: C4.1 R2.1 | length 61
  Top Layer w10: C4.1 ccw(c2134,2433.97) 2163.68,2404.29 2165.54,2406.15 ccw(c2142.69,2429) R2.1
NetC8_1: C8.1 R4.2 R14.2 U2.5 | length 237.5
  Top Layer w30: U2.5 2566.14,2124.11 ccw(c2592.11,2124.11) 2573.75,2105.75 ccw(c2580.99,2112.99) 2580.99,2102.75 2646.42,2102.75 ccw(c2646.42,2120.16) 2658.73,2107.85 ; R14.2 ccw(c2692.07,2117.77) 2668.51,2094.21 C8.1 ccw(c2652.54,2110.18) 2703.75,2110.18 R4.2
NetC14_1: C14.1 R9.1 | length 83.8
  Top Layer w10: C14.1@2009,2328.13 cw(c2009,2321.19) 2013.91,2326.09 ; C14.1 2030.98,2309.02 ccw(c2060,2338.04) 2060,2297 R9.1
NetC16_1: C16.1 L1.1 U2.6 | length 127.9
  Top Layer w30: L1.1@2415.75,2106.02 cw(c2446.48,2106.02) 2424.75,2127.75 cw(c2494.76,2057.74) 2494.76,2156.75 2520.75,2156.75
NetC16_2: C16.2 U2.1 | length 73.2
  Top Layer w20: C16.2 2483.75,2080.06 ccw(c2511.06,2080.06) 2491.75,2060.75 ccw(c2510.34,2079.34) 2510.34,2053.05 U2.1
NetC30_1: C30.1 U6.22 | length 85.4
  Top Layer w7: C30.1 2255,2380.59 cw(c2258.41,2380.59) 2256,2383 cw(c2268.66,2370.34) 2268.66,2388.24 U6.22
NetD2_K: D2.K R30.2 | length 121.6
  Top Layer w12: D2.K 2277.9,2878 ccw(c2277.9,2884.83) R30.2 ; D2.K@2217.02,2869.3 cw(c2238.03,2848.29) 2238.03,2878 cw(c2238.03,2907.71) D2.K@2217.02,2886.7
NetD3_K: D3.K R31.2 | length 119
  Top Layer w12: D3.K 2252.17,2804 ccw(c2252.17,2841.56) R31.2 ; D3.K@2218.02,2795.3 cw(c2239.03,2774.29) 2239.03,2804 cw(c2239.03,2833.71) D3.K@2218.02,2812.7
NetR14_1: R14.1 U2.4 | length 50.9
  Top Layer w30: U2.4@2608.75,2159.75 cw(c2616.72,2151.78) 2616.72,2163.05 R14.1
NetR20_2: R20.2 U6.44 | length 85
  Top Layer w7: U6.44 2559.37,2457.14 cw(c2578.34,2438.17) 2578.34,2465 2590.02,2465 cw(c2590.02,2436.75) R20.2
NetR36_1: R36.1 U6.17 | length 578.4
  Top Layer w7: v2@2242,2449 cw(c2261.66,2429.34) 2261.66,2457.14 U6.17
  Top Layer w10: 2579,2281 cw(c2627.28,2281) 2593.14,2315.14 2598.69,2320.69 cw(c2626,2293.37) v2(2626,2332)
  Bottom Layer w10: v2(2242,2447) cw(c2242,2410.79) 2267.61,2436.39 2319.64,2384.36 ccw(c2405,2469.71) 2405,2349 2595,2349 cw(c2595,2315.2) 2618.9,2339.1 v2(2626,2332)
NRST: C21.2 P2.5 R21.1 T9.1 U6.7 | length 1112.9
  Top Layer w7: v2(2405,2622) 2405,2617.93 ccw(c2445.59,2617.93) 2416.89,2589.23 ; U6.7@2417.11,2558 2417.11,2589.01
  Top Layer w12: v2@2279.05,2684.05 cw(c2257.92,2662.92) C21.2@2287.8,2662.92 ; v2@2281.04,2682.66 cw(c2276.09,2672.05) C21.2@2287.8,2672.05 ; R21.1 C21.2@2287.8,2672.48
  Bottom Layer w12: v2(2284,2689) ccw(c2308.14,2713.14) 2308.14,2679 T9.1@2327,2679 ; T9.1@2335.33,2665 cw(c2335.33,2576.47) 2397.93,2639.07 cw(c2380.86,2622) v2(2405,2622) 2405,2784.94 cw(c2492.06,2784.94) 2430.5,2846.5 cw(c2473.96,2803.04) 2473.96,2864.5 2883.19,2864.5 ccw(c2883.19,2951.56) 2944.75,2890 ccw(c2927.25,2907.5) 2952,2907.5 P2.5@2952,2935 ; v2@2400.05,2626.95 ccw(c2388.1,2638.9) 2405,2638.9 ccw(c2421.9,2638.9) v2@2409.95,2626.95
OP1INN: C1.2 R1.1 U1.3 | length 178.9
  Top Layer w10: U1.3 1953.19,2390.81 1978.5,2365.5 ccw(c1994.8,2381.8) 1994.8,2358.75 2012,2358.75 cw(c2012,2315.29) 2042.73,2346.02 2048,2340.75 2080.87,2340.75 cw(c2080.87,2328.42) 2089.59,2337.14 ; R1.1@2057.19,2335.75 cw(c2069.25,2323.68) 2069.25,2340.75 ; 2049.27,2339.48 cw(c2044.79,2335) 2051.13,2335 ccw(c2044.79,2335) 2049.27,2339.48
OP1OUT: C1.1 C4.2 R1.2 U1.4 | length 182.8
  Top Layer w10: U1.4 ccw(c1967.44,2405.03) 1967.2,2404.8 1967.37,2404.63 ccw(c2022,2459.25) 2022,2382 R1.2@2051.59,2382 ; R1.2@2054,2383 cw(c2051.59,2385.41) R1.2@2051.59,2382 ; C4.2@2132.06,2348.67 ccw(c2051.59,2268.2) R1.2@2051.59,2382
OP2INN: C5.2 R2.2 R3.1 U1.5 | length 161.5
  Top Layer w10: U1.5 ccw(c1983.38,2418.95) 1981.72,2417.28 ccw(c2016.2,2451.76) 2007.95,2403.7 ccw(c2007.95,2424.84) 2022.89,2409.89 2030.53,2417.53 cw(c2053.39,2394.68) 2053.39,2427 2124.9,2427 ccw(c2124.9,2433.83) R2.2
OP2INP: C15.1 U1.7 | length 147.7
  Top Layer w10: U1.7 cw(c1997.62,2471.84) 1995.73,2473.73 ccw(c1995.73,2517.18) 2026.46,2486.46 2047.99,2507.99 ccw(c2038.32,2517.67) 2052,2517.67 2052,2567.17 ccw(c2045.17,2567.17) C15.1@2050,2572 ; C15.1@2048.34,2569.07 cw(c2046.61,2563.97) 2052,2563.97 ; C15.1@2048.75,2568.81 cw(c2040.91,2560.97) 2052,2560.97
OP2OUT: C5.1 C10.1 R3.2 R5.1 U1.6 U6.16 | length 482.4
  Top Layer w7: 2254.32,2471 2288.31,2471 cw(c2288.31,2470.73) 2288.5,2470.92 U6.16
  Top Layer w10: U1.6 ccw(c1994.95,2446.39) 2004.51,2436.83 cw(c2064.13,2377.2) 2064.13,2461.53 2187.54,2461.53 ccw(c2187.54,2493.87) 2210.41,2471 2254.32,2471 ; R5.1 C10.1 ccw(c2209.49,2360.9) 2215,2360.9 2215,2465
OPCAP: C14.2 U1.2 | length 50.9
  Top Layer w10: U1.2 1950,2366.46 1950,2361.72 ccw(c1969.72,2361.72) 1969.72,2342
OUT: U6.29 | length 89.4
  Top Layer w7: v2@2397.28,2284.72 ccw(c2382.68,2299.32) 2403.33,2299.32 ; 2403.33,2302.55 ccw(c2428.55,2302.55) v2@2410.72,2284.72 ; U6.29 2403.33,2279.62 ccw(c2405.62,2279.62) v2(2404,2278)
OUT1: R36.2
PULSE: U1.11 U6.42 | length 781.8
  Top Layer w7: U6.42@2544,2429.58 2566.58,2429.58 v2@2574,2437
  Top Layer w10: U1.11 ccw(c1939.27,2528.12) 1939.7,2527.7 1948.27,2536.27 ccw(c1917.54,2567) v2(1961,2567)
  Bottom Layer w10: v2(1961,2567) cw(c1994.8,2533.2) 1994.8,2581 2154,2581 cw(c2154,2506.16) 2206.92,2559.08 2341.64,2424.36 ccw(c2427,2509.71) 2427,2389 2474,2389 ccw(c2474,2509.71) 2559.36,2424.36 v2(2573,2438)
RED_LED: R30.1 U6.11 | length 356.4
  Top Layer w7: R30.1@2327.02,2884.5 cw(c2327.02,2869.08) 2337.92,2879.98 cw(c2298.51,2840.57) 2354.25,2840.57 2354.25,2819.74 cw(c2290.29,2819.74) 2335.52,2774.52 ccw(c2344,2766.03) 2332,2766.03 2332,2632.14 ccw(c2404.76,2632.14) 2353.31,2580.69 2361.77,2572.23 ; U6.11@2362,2555 2362,2571.99
RX2: U1.21 | length 195.3
  Top Layer w8: 1802.86,2227 1802.86,2363.27 U1.21
SWCLK: P2.2 U6.37 | length 630.6
  Top Layer w7: U6.37@2541,2358 2557.13,2358 ccw(c2557.13,2422.87) 2603,2377 2604.64,2378.64 ccw(c2519.29,2464) 2640,2464 2640,2879 cw(c2664.14,2879) 2647.07,2896.07
  Top Layer w20: 2647.07,2896.07 P2.2
SWDIO: P2.3 U6.34 | length 868
  Top Layer w7: U6.34 2472.23,2300.97 ccw(c2484.78,2300.97) 2475.91,2292.09 2480.57,2287.43 ccw(c2513,2319.87) 2513,2274 ccw(c2513,2302.97) 2533.49,2282.49 2656,2405 2656,2844.5 cw(c2676.52,2844.5) 2662.01,2859.01 cw(c2662.61,2859.01) 2662.19,2859.44 cw(c2688.9,2832.73) 2688.9,2870.5 2706.54,2870.5 ccw(c2706.54,2931.96) 2750,2888.5 ; P2.3@2762.58,2901.08 ccw(c2744.65,2919) P2.3
  Top Layer w20: 2750,2888.5 P2.3@2762.58,2901.08
TPVBG: C9.2 U1.18 | length 74.3
  Top Layer w10: C9.2 ccw(c1759.28,2477.28) 1759.28,2473 1815.62,2473 cw(c1815.62,2471.84) U1.18 ; C9.2@1758.19,2476.52 ccw(c1766.69,2485.03) 1766.69,2473
TXN: U1.16 | length 189.7
  Top Layer w8: 1802.86,2541.44 U1.16@1834.73,2509.57 ; 1802.86,2542.15 1802.86,2686.75
USART2_RX: U6.13
USART2_TX: U6.12
USART_RX: P1.2 U6.2 | length 560
  Top Layer w7: v2@2481.5,2614.25 cw(c2470.62,2603.37) 2486.01,2603.37 U6.2@2486.01,2558
  Bottom Layer w12: v2(2476.25,2607.5) ccw(c2526.34,2607.5) 2490.92,2572.08 2559.14,2503.86 ccw(c2644.5,2589.21) 2644.5,2468.5 2780.27,2468.5 cw(c2780.27,2347.79) 2865.62,2433.14 P1.2
USART_TX: P1.3 U6.1 | length 648.7
  Top Layer w7: U6.1@2501,2551 2501,2595.54 cw(c2526.24,2595.54) 2508.39,2613.39 cw(c2517.1,2604.69) 2517.1,2617 2529.51,2617 cw(c2529.51,2596.51) 2544,2611 cw(c2539.17,2606.17) 2546,2606.17 v2(2546,2601)
  Bottom Layer w12: v2@2546,2594 cw(c2546,2576.5) 2558.38,2588.87 ; v2@2546,2599.5 cw(c2546,2595.28) 2548.99,2598.26 2605.64,2541.61 ccw(c2691,2626.96) 2691,2506.25 P1.3@2904.5,2506.25 ; v2@2553,2601 ccw(c2569.3,2601) 2557.77,2589.48 ; 2822.58,2506.25 cw(c2822.58,2441.49) P1.3@2868.37,2487.28 ; 2833.84,2506.25 ccw(c2833.84,2555.09) P1.3@2868.37,2520.55 ; 2851.55,2506.25 cw(c2851.55,2470.46) P1.3@2876.86,2495.77
VBPA: R18.2 R19.1 U1.14 | length 441.1
  Top Layer w10: U1.14@1872.44,2527.56 1865.78,2534.22 cw(c1884.56,2553) 1858,2553 cw(c1911.11,2553) 1873.56,2590.56 1882.47,2599.47 cw(c1961,2520.95) v2(1961,2632) ; v2(2134,2658) ccw(c2145.84,2669.84) 2145.84,2653.1 2160.47,2653.1 cw(c2160.47,2678.71) v2@2140.3,2662.93 ; R19.1 cw(c2157.59,2664.59) 2161,2664.59 R18.2@2161,2629
  Bottom Layer w10: v2(1961,2632) 2071.23,2632 ccw(c2071.23,2720.77) v2(2134,2658)
VCTRL: C13.1 R7.2 R8.1 U1.8 | length 347.8
  Top Layer w10: U1.8 cw(c1981.67,2485.76) 1981.21,2486.21 2009,2514 v2(2017,2514) ; v2@2179.78,2508.22 cw(c2198.56,2527) 2172,2527 2232.26,2527 cw(c2232.26,2508.99) R7.2 ; 2191.56,2527 cw(c2191.56,2512.5) R8.1@2201.81,2522.75 ; R8.1@2208.19,2522.75 cw(c2218.44,2512.5) 2218.44,2527
  Bottom Layer w10: v2(2017,2514) ccw(c2017,2518.83) 2020.41,2515.41 cw(c2072.53,2463.3) 2072.53,2537 2104.33,2537 cw(c2104.33,2424.33) v2(2184,2504)
XTALA: C23.2 U6.5 Y1.1 | length 273.8
  Top Layer w7: U6.5@2444.67,2559 2444.67,2629.48 cw(c2476.52,2629.48) 2454,2652 2480.03,2678.03 cw(c2537.24,2620.81) 2537.24,2701.72 C23.2 ; 2464.43,2662.43 ccw(c2431.08,2695.79) Y1.1@2478.25,2695.79 ; 2476.38,2674.38 ccw(c2454.98,2695.79) Y1.1@2485.25,2695.79 ; 2482.03,2680.03 cw(c2490.5,2671.57) Y1.1@2490.5,2683.54
XTALB: C24.2 U6.6 Y1.3 | length 376
  Top Layer w7: 2406.35,2771.35 cw(c2417.31,2760.39) Y1.3@2424.93,2773.89 ; Y1.3 cw(c2438.38,2797.21) 2423,2797.21 cw(c2400.76,2797.21) 2416.49,2781.49 2406.85,2771.85 ccw(c2442.7,2736) 2392,2736 2392,2692.63 ccw(c2446.63,2692.63) 2408,2654 2417.68,2644.32 cw(c2386.32,2612.96) 2430.67,2612.96 ; U6.6@2430.89,2559 2430.89,2616
  Top Layer w12: Y1.3@2423,2797.21 C24.2 ; 2423,2828.62 ccw(c2461.91,2828.62) Y1.3@2434.4,2801.11
pads on no net: U1.19 U6.3 U6.4 U6.20 U6.21 U6.25 U6.26 U6.27 U6.28 U6.30 U6.31 U6.32 U6.33 U6.38 U6.39 U6.40 U6.43 U6.45 U6.46 Y1.2 Y1.4

## Polygon pours and split planes (outlines as drawn)
GND on Top Layer "Bottom Layer-No Net" (solid, remove dead copper, pour order 1000): 1507.55,3006.35 1507.55,1904.02 1562.47,1904.02 1562.47,2243.02 1617.59,2243.02 2089.01,2243.02 2089.74,2243.72 2091.27,2245.19 2091.27,2661.43 2089.84,2662.8 1797.46,2662.8 1562.69,2662.8 1562.47,2663.02 1562.47,3006.35 1507.55,3006.35
GND on Bottom Layer "Bottom Layer-No Net" (solid, remove dead copper, pour order 1001): 1498.81,3009.74 3075.61,3009.74 3075.61,1907.4 1498.81,1907.4 1498.81,3009.74

## Keep-outs
Keep-Out Layer:
  the board outline again, w10

## Other copper
Top Layer:
  pour cut-out: 1816.11,2546.93 1833.35,2564.16 1833.35,2661.79 1771.93,2661.79 1771.93,2571.25 1789.6,2546.93
  pour cut-out: 1816.11,2357.78 1833.35,2340.55 1833.35,2242.92 1771.93,2242.92 1771.93,2333.46 1789.6,2357.78
  region net GND: 2043.7,2251.96 2110.28,2251.96 2110.28,1918.5 2038,1918.5 2038,2248.11 2042.78,2252.88
  region net GND: 2034.86,2988.5 2107.14,2988.5 2107.14,2653 2034.86,2653
  region net RX2: 1797.9,2245.03 1636.6,2096.53 1804.59,1914.06 1972.59,2068.72 1811.28,2243.92 1805,2250.75
  region net TXN: 1797.9,2662.72 1636.6,2811.22 1804.59,2993.69 1972.59,2839.03 1811.28,2663.83 1805,2657

## Silkscreen, mask and mechanical layers (free items; w line width, h text height)
Top Overlay:
  circle w20: c2567,2582 r13.34
  circle w20: c2509,2669 r6
  circle w20: c2490.25,2058.75 r5.25
  lines w8: 2013,2533 2034,2533 ; 2028,2589 2028,2569 ccw(c2041.82,2569) 2032.05,2559.23 ; 2052,2321 2057.69,2321 ccw(c2057.69,2348.31) 2077,2329 ; 2126,2676 cw(c2104.27,2654.27) 2135,2654.27 2135,2592 ; 2162,2591 ccw(c2162,2595.83) 2165.41,2592.41 cw(c2174.07,2583.76) 2174.07,2596 ; 2199,2508.28 ccw(c2211.74,2508.28) 2202.73,2499.27 2208.29,2493.71 ccw(c2210,2495.41) 2210,2493
  lines w10: 2044,2257 ccw(c2044,2273.9) 2055.95,2261.95 2056,2262 ccw(c2043.26,2274.74) 2061.28,2274.74 2061.28,2279 ; 2111.39,2456.72 cw(c2125.05,2456.72) 2115.39,2466.39 2121,2472 ; 2152,2392.81 2159.54,2392.81 ccw(c2159.54,2393.46) 2160,2393 ; 2179,2289 ccw(c2176.59,2291.41) 2180,2291.41 2180,2298
  lines w15: 2205.5,1965.25 2205.5,1995.25
  text "3.3V" at 2503,2877.5 h60 r90
  text "GND" at 2813,2807.5 h60
  text "DIO" at 2719.25,2807 h60
  text "CLK" at 2607.25,2805.75 h60
  text "RST" at 2941.5,2805.75 h60
  text "GND" at 2955,2598 h40
  text "TX" at 2965,2493 h40
  text "RX" at 2965,2393 h40
  text "VCC" at 2960,2293 h40
  text "V22" at 2028.5,2019.75 h70 r90
  text "CD2840ADX" at 1618.5,1936.25 h60 r90

## Text inside footprints (layer, text, board x,y; h text height)
D5: Top Overlay "+" at 2190,2154 h39.37